# Altium PCB Grabber_DIOT.PCBDOC (part 5 of 7)
Units mm, origin at the board's own origin, x right, y up, seen from the top; angles counter-clockwise.
Board outline 222.9 x 100 mm, 4 copper layers (L1, P2, P3, L4), stack 1.6 mm thick; 235 components, 180 nets, 1032 pads, 664 vias.
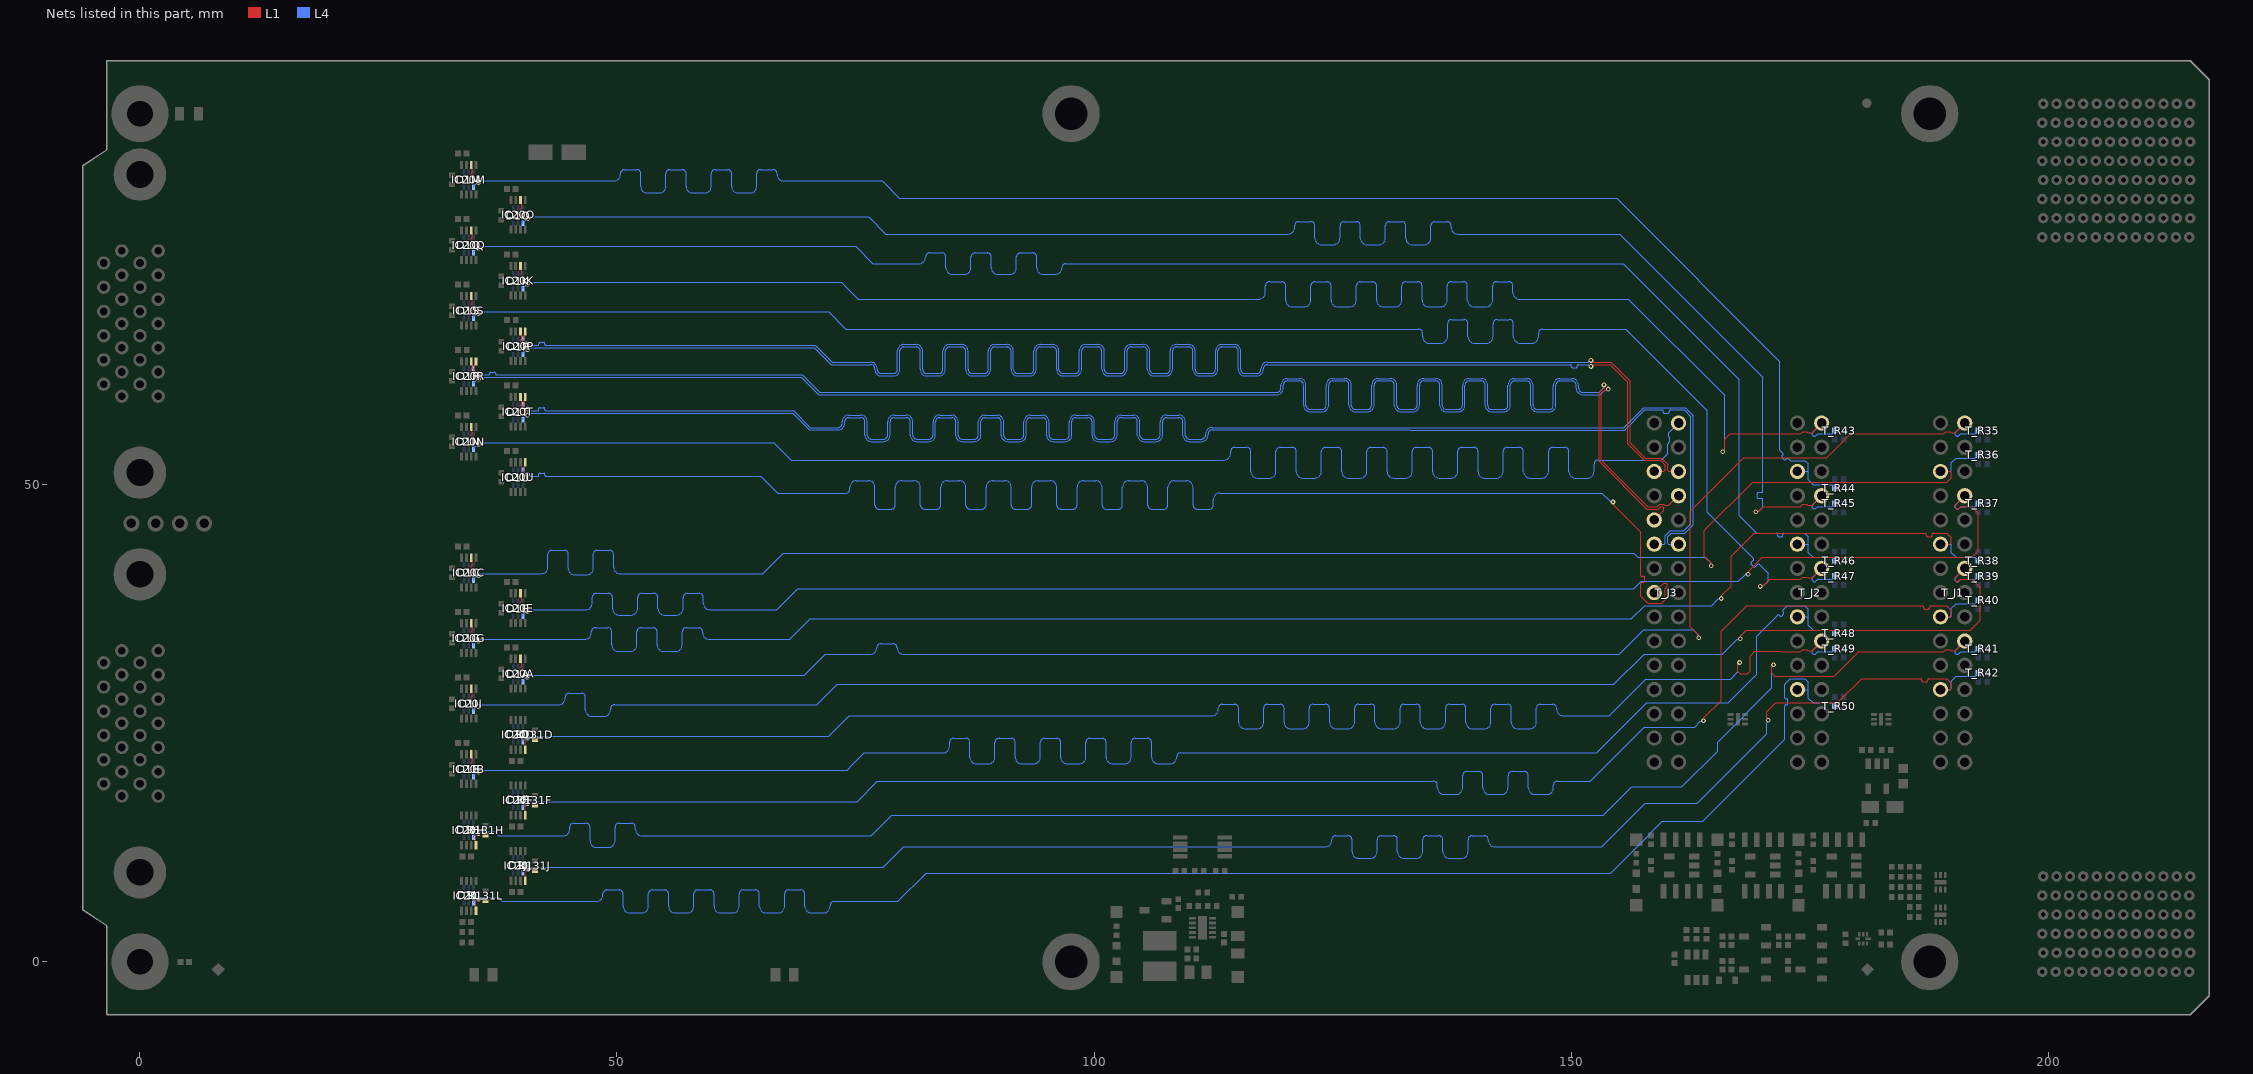
[diagram p6: the nets of this part, all layers, seen from the top]

## Via types
v1: diameter 0.5, hole 0.25, L1 to L4, tented both sides, 661 vias
v2: diameter 0.5, hole 0.25, L1 to L4, 3 vias

## Nets (pads, with @x,y where several pads share a name; then routed paths per layer and width w, separated by ;. In a path a pad name is that pad's centre, name@x,y a point inside that pad or via, vN(x,y) a via of type N, cw(c..) or ccw(c..) an arc to the next point about the centre after c; other vN are vias at no path point) (continued)
EEM_IO.LVDS_N17: D1P.6 IC20P.5 T_J3.6 | length 176.2
  L1 w0.127: IC20P.5@40.378,66.099 40.378,65.824 40.257,65.704 40.257,65.189 40.122,65.054 40.122,64.687 40.197,64.613 40.372,64.613 40.558,64.799 v1(40.633,64.799) ; v1(152.089,63.036) 152.164,63.036 152.349,62.85 154.219,62.85 156.041,61.028 156.19,60.879 156.19,54.399 157.783,52.806 159.485,52.806 160.127,52.164 160.127,51.535 160.262,51.4 T_J3.6@161.27,51.4
  L4 w0.127: D1P.6@40.13,65.276 40.13,65.141 40.217,65.055 40.276,65.055 40.532,64.799 v1(40.633,64.799) 40.708,64.799 40.894,64.613 41.625,64.613 41.688,64.613 ccw(c41.688,64.74) 41.815,64.74 41.815,64.807 cw(c41.941,64.807) 41.941,64.932 42.317,64.932 cw(c42.317,64.807) 42.442,64.807 42.442,64.74 ccw(c42.569,64.74) 42.569,64.613 42.939,64.613 70.786,64.613 72.549,62.85 75.386,62.85 76.596,62.85 cw(c76.596,62.171) 77.275,62.171 77.275,62.098 ccw(c77.701,62.098) 77.701,61.673 78.977,61.673 ccw(c78.977,62.098) 79.402,62.098 79.402,64.029 cw(c80.082,64.029) 80.082,64.709 81.358,64.709 cw(c81.358,64.029) 82.037,64.029 82.037,62.098 ccw(c82.463,62.098) 82.463,61.673 83.739,61.673 ccw(c83.739,62.098) 84.164,62.098 84.164,64.029 cw(c84.844,64.029) 84.844,64.709 86.12,64.709 cw(c86.12,64.029) 86.799,64.029 86.799,62.098 ccw(c87.225,62.098) 87.225,61.673 88.501,61.673 ccw(c88.501,62.098) 88.926,62.098 88.926,64.029 cw(c89.606,64.029) 89.606,64.709 90.882,64.709 cw(c90.882,64.029) 91.561,64.029 91.561,62.098 ccw(c91.987,62.098) 91.987,61.673 93.263,61.673 ccw(c93.263,62.098) 93.688,62.098 93.688,64.029 cw(c94.368,64.029) 94.368,64.709 95.644,64.709 cw(c95.644,64.029) 96.323,64.029 96.323,62.098 ccw(c96.749,62.098) 96.749,61.673 98.025,61.673 ccw(c98.025,62.098) 98.45,62.098 98.45,64.029 cw(c99.13,64.029) 99.13,64.709 100.406,64.709 cw(c100.406,64.029) 101.085,64.029 101.085,62.098 ccw(c101.511,62.098) 101.511,61.673 102.787,61.673 ccw(c102.787,62.098) 103.212,62.098 103.212,64.029 cw(c103.892,64.029) 103.892,64.709 105.168,64.709 cw(c105.168,64.029) 105.847,64.029 105.847,62.098 ccw(c106.273,62.098) 106.273,61.673 107.549,61.673 ccw(c107.549,62.098) 107.974,62.098 107.974,64.029 cw(c108.654,64.029) 108.654,64.709 109.93,64.709 cw(c109.93,64.029) 110.609,64.029 110.609,62.098 ccw(c111.035,62.098) 111.035,61.673 112.311,61.673 ccw(c112.311,62.098) 112.736,62.098 112.736,64.029 cw(c113.416,64.029) 113.416,64.709 114.692,64.709 cw(c114.692,64.029) 115.371,64.029 115.371,62.098 ccw(c115.797,62.098) 115.797,61.673 117.073,61.673 ccw(c117.073,62.098) 117.498,62.098 117.498,62.171 cw(c118.178,62.171) 118.178,62.85 118.368,62.85 151.828,62.85 152.013,63.036 v1(152.089,63.036)
EEM_IO.LVDS_N18: D1R.6 IC20R.5 T_J3.9 | length 176.3
  L1 w0.127: IC20R.5@35.215,63.006 35.215,62.731 35.095,62.61 35.095,62.095 34.96,61.96 34.96,61.593 35.034,61.519 35.209,61.519 35.395,61.705 v1(35.47,61.705) ; v1(153.463,60.474) 153.41,60.42 153.41,60.158 152.94,59.688 152.94,52.469 153.014,52.395 157.946,47.463 159.154,47.463 159.391,47.7 159.61,47.7 159.63,47.68 159.731,47.579 159.731,47.321 T_J3.9@158.73,46.32
  L4 w0.127: D1R.6@34.968,62.183 34.968,62.048 35.054,61.961 35.113,61.961 35.369,61.705 v1(35.47,61.705) 35.545,61.705 35.731,61.519 36.462,61.519 36.526,61.519 ccw(c36.526,61.646) 36.653,61.646 36.653,61.654 cw(c36.778,61.654) 36.778,61.779 37.154,61.779 cw(c37.154,61.654) 37.28,61.654 37.28,61.646 ccw(c37.407,61.646) 37.407,61.519 37.777,61.519 69.434,61.519 71.247,59.706 118.967,59.706 119.157,59.706 ccw(c119.157,60.132) 119.582,60.132 119.582,60.458 cw(c120.262,60.458) 120.262,61.137 121.538,61.137 cw(c121.538,60.458) 122.217,60.458 122.217,58.34 ccw(c122.643,58.34) 122.643,57.914 123.919,57.914 ccw(c123.919,58.34) 124.344,58.34 124.344,60.458 cw(c125.024,60.458) 125.024,61.137 126.3,61.137 cw(c126.3,60.458) 126.979,60.458 126.979,58.34 ccw(c127.405,58.34) 127.405,57.914 128.681,57.914 ccw(c128.681,58.34) 129.106,58.34 129.106,60.458 cw(c129.786,60.458) 129.786,61.137 131.062,61.137 cw(c131.062,60.458) 131.741,60.458 131.741,58.34 ccw(c132.167,58.34) 132.167,57.914 133.443,57.914 ccw(c133.443,58.34) 133.868,58.34 133.868,60.458 cw(c134.548,60.458) 134.548,61.137 135.824,61.137 cw(c135.824,60.458) 136.503,60.458 136.503,58.34 ccw(c136.929,58.34) 136.929,57.914 138.205,57.914 ccw(c138.205,58.34) 138.63,58.34 138.63,60.458 cw(c139.31,60.458) 139.31,61.137 140.586,61.137 cw(c140.586,60.458) 141.265,60.458 141.265,58.34 ccw(c141.691,58.34) 141.691,57.914 142.967,57.914 ccw(c142.967,58.34) 143.392,58.34 143.392,60.458 cw(c144.072,60.458) 144.072,61.137 145.348,61.137 cw(c145.348,60.458) 146.027,60.458 146.027,58.34 ccw(c146.453,58.34) 146.453,57.914 147.729,57.914 ccw(c147.729,58.34) 148.154,58.34 148.154,60.458 cw(c148.834,60.458) 148.834,61.137 150.11,61.137 cw(c150.11,60.458) 150.789,60.458 150.789,60.132 ccw(c151.215,60.132) 151.215,59.706 152.019,59.706 152.958,59.706 153.41,60.158 153.41,60.42 v1(153.463,60.474)
EEM_IO.LVDS_N19: D1T.6 IC20T.5 T_J3.12 | length 176.3
  L1 w0.127: IC20T.5@40.378,59.236 40.378,58.961 40.257,58.84 40.257,58.325 40.122,58.19 40.122,57.823 40.197,57.749 40.372,57.749 40.558,57.935 v1(40.633,57.935)
  L4 w0.127: D1T.6@40.13,58.412 40.13,58.277 40.217,58.191 40.276,58.191 40.532,57.935 v1(40.633,57.935) 40.708,57.935 40.894,57.749 41.625,57.749 41.688,57.749 ccw(c41.688,57.876) 41.815,57.876 41.815,57.971 cw(c41.941,57.971) 41.941,58.096 42.317,58.096 cw(c42.317,57.971) 42.442,57.971 42.442,57.876 ccw(c42.569,57.876) 42.569,57.749 42.939,57.749 68.527,57.749 70.277,55.999 72.987,55.999 73.177,55.999 ccw(c73.177,56.424) 73.603,56.424 73.603,56.619 cw(c74.282,56.619) 74.282,57.298 75.558,57.298 cw(c75.558,56.619) 76.238,56.619 76.238,55.212 ccw(c76.663,55.212) 76.663,54.787 77.939,54.787 ccw(c77.939,55.212) 78.365,55.212 78.365,56.619 cw(c79.044,56.619) 79.044,57.298 80.32,57.298 cw(c80.32,56.619) 81,56.619 81,55.212 ccw(c81.425,55.212) 81.425,54.787 82.701,54.787 ccw(c82.701,55.212) 83.127,55.212 83.127,56.619 cw(c83.806,56.619) 83.806,57.298 85.082,57.298 cw(c85.082,56.619) 85.762,56.619 85.762,55.212 ccw(c86.187,55.212) 86.187,54.787 87.463,54.787 ccw(c87.463,55.212) 87.889,55.212 87.889,56.619 cw(c88.568,56.619) 88.568,57.298 89.844,57.298 cw(c89.844,56.619) 90.524,56.619 90.524,55.212 ccw(c90.949,55.212) 90.949,54.787 92.225,54.787 ccw(c92.225,55.212) 92.651,55.212 92.651,56.619 cw(c93.33,56.619) 93.33,57.298 94.606,57.298 cw(c94.606,56.619) 95.286,56.619 95.286,55.212 ccw(c95.711,55.212) 95.711,54.787 96.987,54.787 ccw(c96.987,55.212) 97.413,55.212 97.413,56.619 cw(c98.092,56.619) 98.092,57.298 99.368,57.298 cw(c99.368,56.619) 100.048,56.619 100.048,55.212 ccw(c100.473,55.212) 100.473,54.787 101.749,54.787 ccw(c101.749,55.212) 102.175,55.212 102.175,56.619 cw(c102.854,56.619) 102.854,57.298 104.13,57.298 cw(c104.13,56.619) 104.81,56.619 104.81,55.212 ccw(c105.235,55.212) 105.235,54.787 106.511,54.787 ccw(c106.511,55.212) 106.937,55.212 106.937,56.619 cw(c107.616,56.619) 107.616,57.298 108.892,57.298 cw(c108.892,56.619) 109.572,56.619 109.572,55.212 ccw(c109.997,55.212) 109.997,54.787 111.273,54.787 ccw(c111.273,55.212) 111.699,55.212 111.699,55.32 cw(c112.378,55.32) 112.378,55.999 114.278,55.999 133.217,55.999 133.23,55.986 155.505,55.986 157.617,58.099 161.984,58.099 162.819,57.264 162.819,45.83 161.912,44.923 160.481,44.923 160.127,44.569 160.127,43.854 160.201,43.78 T_J3.12@161.27,43.78
EEM_IO.LVDS_N20: D1U.6 IC20U.5 T_J3.15 | length 176.2
  L1 w0.127: IC20U.5@40.378,52.372 40.378,52.097 40.257,51.976 40.257,51.461 40.122,51.327 40.122,50.96 40.197,50.885 40.372,50.885 40.558,51.071 v1(40.633,51.071) ; v1(154.404,48.199) 154.458,48.146 154.458,47.884 154.583,47.759 157.313,45.028 157.313,40.59 157.313,40.526 ccw(c157.44,40.526) 157.44,40.399 157.612,40.399 cw(c157.612,40.274) 157.737,40.274 157.737,39.898 cw(c157.612,39.898) 157.612,39.772 157.44,39.772 ccw(c157.44,39.645) 157.313,39.645 157.313,39.119 157.313,38.334 158.058,37.59 159.506,37.59 159.873,37.957 159.873,39.124 160.11,39.361 160.11,39.58 160.09,39.6 159.989,39.701 159.731,39.701 T_J3.15@158.73,38.7
  L4 w0.127: D1U.6@40.13,51.549 40.13,51.414 40.217,51.327 40.276,51.327 40.532,51.071 v1(40.633,51.071) 40.708,51.071 40.894,50.885 41.625,50.885 41.688,50.885 ccw(c41.688,51.012) 41.815,51.012 41.815,51.107 cw(c41.941,51.107) 41.941,51.232 42.317,51.232 cw(c42.317,51.107) 42.442,51.107 42.442,51.012 ccw(c42.569,51.012) 42.569,50.885 42.939,50.885 65.064,50.885 66.827,49.122 73.793,49.122 73.983,49.122 ccw(c73.983,49.548) 74.409,49.548 74.409,49.746 cw(c75.088,49.746) 75.088,50.426 76.364,50.426 cw(c76.364,49.746) 77.044,49.746 77.044,47.873 ccw(c77.469,47.873) 77.469,47.448 78.745,47.448 ccw(c78.745,47.873) 79.171,47.873 79.171,49.746 cw(c79.85,49.746) 79.85,50.426 81.126,50.426 cw(c81.126,49.746) 81.806,49.746 81.806,47.873 ccw(c82.231,47.873) 82.231,47.448 83.507,47.448 ccw(c83.507,47.873) 83.933,47.873 83.933,49.746 cw(c84.612,49.746) 84.612,50.426 85.888,50.426 cw(c85.888,49.746) 86.568,49.746 86.568,47.873 ccw(c86.993,47.873) 86.993,47.448 88.269,47.448 ccw(c88.269,47.873) 88.695,47.873 88.695,49.746 cw(c89.374,49.746) 89.374,50.426 90.65,50.426 cw(c90.65,49.746) 91.33,49.746 91.33,47.873 ccw(c91.755,47.873) 91.755,47.448 93.031,47.448 ccw(c93.031,47.873) 93.457,47.873 93.457,49.746 cw(c94.136,49.746) 94.136,50.426 95.412,50.426 cw(c95.412,49.746) 96.092,49.746 96.092,47.873 ccw(c96.517,47.873) 96.517,47.448 97.793,47.448 ccw(c97.793,47.873) 98.219,47.873 98.219,49.746 cw(c98.898,49.746) 98.898,50.426 100.174,50.426 cw(c100.174,49.746) 100.854,49.746 100.854,47.873 ccw(c101.279,47.873) 101.279,47.448 102.555,47.448 ccw(c102.555,47.873) 102.981,47.873 102.981,49.746 cw(c103.66,49.746) 103.66,50.426 104.936,50.426 cw(c104.936,49.746) 105.616,49.746 105.616,47.873 ccw(c106.041,47.873) 106.041,47.448 107.317,47.448 ccw(c107.317,47.873) 107.743,47.873 107.743,49.746 cw(c108.422,49.746) 108.422,50.426 109.698,50.426 cw(c109.698,49.746) 110.378,49.746 110.378,47.873 ccw(c110.803,47.873) 110.803,47.448 112.079,47.448 ccw(c112.079,47.873) 112.505,47.873 112.505,48.443 cw(c113.184,48.443) 113.184,49.122 115.338,49.122 153.219,49.122 154.089,48.253 154.351,48.253 v1(154.404,48.199)
EEM_IO.LVDS_P0: D1A.1 IC20A.6 T_J1.2 T_R35.2 | length 180.6
  L1 w0.127: IC20A.6@39.878,31.78 39.878,31.505 40.003,31.38 40.003,30.975 39.868,30.84 39.868,30.263 40.092,30.04 40.372,30.04 40.558,29.854 v1(40.633,29.854) ; v1(163.389,33.958) 163.335,34.011 163.335,34.274 162.5,35.11 162.5,47.212 168.108,52.821 176.792,52.821 179.309,55.337 186.027,55.337 189.049,55.337 189.286,55.574 189.715,55.574 189.736,55.554 189.81,55.479 190.269,55.479 T_J1.2@191.27,56.48
  L4 w0.127: D1A.1@40.13,29.377 40.13,29.512 40.217,29.599 40.277,29.599 40.532,29.854 v1(40.633,29.854) 40.708,29.854 40.894,30.04 69.638,30.04 71.834,32.236 76.358,32.236 76.549,32.236 ccw(c76.549,32.916) 77.228,32.916 cw(c77.653,32.916) 77.653,33.342 78.93,33.342 cw(c78.93,32.916) 79.355,32.916 ccw(c80.034,32.916) 80.034,32.236 81.012,32.236 155.045,32.236 157.609,34.8 162.809,34.8 163.335,34.274 163.335,34.011 v1(163.389,33.958) ; T_J1.2@191.27,56.48 190.269,55.479 190.269,55.221 190.37,55.12 190.39,55.1 190.609,55.1 190.846,55.337 192.367,55.337 192.442,55.411 192.442,55.453 T_R35.2@192.668,55.68
EEM_IO.LVDS_P1: D1C.1 IC20C.6 T_J1.5 T_R36.2 | length 181.5
  L1 w0.127: IC20C.6@34.715,42.414 34.715,42.139 34.841,42.014 34.841,41.609 34.706,41.474 34.706,40.897 34.929,40.674 35.209,40.674 35.395,40.488 v1(35.47,40.488) ; v1(164.693,41.523) 164.628,41.588 164.628,41.826 163.991,42.464 163.991,45.213 169.025,50.248 189.38,50.248 189.873,50.742 189.873,51.265 189.738,51.4 T_J1.5@188.73,51.4
  L4 w0.127: D1C.1@34.968,40.011 34.968,40.146 35.054,40.233 35.114,40.233 35.369,40.488 v1(35.47,40.488) 35.545,40.488 35.731,40.674 41.889,40.674 42.079,40.674 ccw(c42.079,41.353) 42.758,41.353 42.758,42.725 cw(c43.184,42.725) 43.184,43.151 44.46,43.151 cw(c44.46,42.725) 44.885,42.725 44.885,41.251 ccw(c45.565,41.251) 45.565,40.571 46.841,40.571 ccw(c46.841,41.251) 47.52,41.251 47.52,42.725 cw(c47.946,42.725) 47.946,43.151 49.222,43.151 cw(c49.222,42.725) 49.647,42.725 49.647,41.353 ccw(c50.327,41.353) 50.327,40.674 51.463,40.674 65.268,40.674 67.403,42.808 156.582,42.808 157,42.39 164.088,42.39 164.64,41.839 164.64,41.576 v1(164.693,41.523) ; T_J1.5@188.73,51.4 189.799,51.4 189.873,51.474 189.873,52.294 190.376,52.797 192.367,52.797 192.442,52.871 192.442,52.913 T_R36.2@192.668,53.14
EEM_IO.LVDS_P2: D1E.1 IC20E.6 T_J1.8 T_R37.2 | length 180.7
  L1 w0.127: IC20E.6@39.878,38.644 39.878,38.369 40.003,38.244 40.003,37.839 39.868,37.704 39.868,37.127 40.092,36.904 40.372,36.904 40.558,36.718 v1(40.633,36.718) ; v1(168.561,40.627) 168.614,40.68 168.614,40.942 170.067,42.395 191.981,42.395 192.667,43.082 192.667,47.028 192.408,47.288 191.978,47.717 190.846,47.717 190.609,47.48 190.39,47.48 190.37,47.5 190.269,47.601 190.269,47.859 T_J1.8@191.27,48.86
  L4 w0.127: D1E.1@40.13,36.241 40.13,36.376 40.138,36.384 40.217,36.463 40.277,36.463 40.532,36.718 v1(40.633,36.718) 40.708,36.718 40.894,36.904 46.534,36.904 46.724,36.904 ccw(c46.724,37.583) 47.404,37.583 47.404,38.191 cw(c47.829,38.191) 47.829,38.617 49.105,38.617 cw(c49.105,38.191) 49.531,38.191 49.531,37.027 ccw(c50.21,37.027) 50.21,36.348 51.486,36.348 ccw(c51.486,37.027) 52.166,37.027 52.166,38.191 cw(c52.591,38.191) 52.591,38.617 53.867,38.617 cw(c53.867,38.191) 54.293,38.191 54.293,37.027 ccw(c54.972,37.027) 54.972,36.348 56.248,36.348 ccw(c56.248,37.027) 56.928,37.027 56.928,38.191 cw(c57.353,38.191) 57.353,38.617 58.629,38.617 cw(c58.629,38.191) 59.055,38.191 59.055,37.583 ccw(c59.734,37.583) 59.734,36.904 60.974,36.904 66.759,36.904 68.944,39.088 156.563,39.088 157.348,39.873 167.545,39.873 168.245,40.573 168.508,40.573 v1(168.561,40.627) ; T_J1.8@191.27,48.86 190.269,47.859 190.269,47.601 190.37,47.5 190.39,47.48 190.609,47.48 190.846,47.717 192.367,47.717 192.442,47.791 192.442,47.833 T_R37.2@192.668,48.06
EEM_IO.LVDS_P3: D1G.1 IC20G.6 T_J1.11 T_R38.2 | length 181.5
  L1 w0.127: IC20G.6@34.715,35.55 34.715,35.275 34.841,35.15 34.841,34.745 34.706,34.61 34.706,34.033 34.929,33.81 35.209,33.81 35.395,33.624 v1(35.47,33.624) ; v1(165.746,38.084) 165.799,38.138 165.799,38.4 166.778,39.379 166.778,42.505 169.205,44.932 186.428,44.932 187.118,44.932 cw(c187.118,44.805) 187.245,44.805 187.245,44.703 ccw(c187.371,44.703) 187.371,44.578 187.747,44.578 ccw(c187.747,44.703) 187.872,44.703 187.872,44.805 cw(c187.999,44.805) 187.999,44.932 188.731,44.932 189.38,44.932 189.873,44.439 189.873,43.915 189.738,43.78 T_J1.11@188.73,43.78
  L4 w0.127: D1G.1@34.968,33.147 34.968,33.282 35.054,33.369 35.114,33.369 35.369,33.624 v1(35.47,33.624) 35.545,33.624 35.731,33.81 46.452,33.81 46.643,33.81 ccw(c46.643,34.489) 47.322,34.489 47.322,34.596 cw(c47.748,34.596) 47.748,35.022 49.024,35.022 cw(c49.024,34.596) 49.449,34.596 49.449,33.222 ccw(c50.129,33.222) 50.129,32.542 51.405,32.542 ccw(c51.405,33.222) 52.084,33.222 52.084,34.596 cw(c52.51,34.596) 52.51,35.022 53.786,35.022 cw(c53.786,34.596) 54.211,34.596 54.211,33.222 ccw(c54.891,33.222) 54.891,32.542 56.167,32.542 ccw(c56.167,33.222) 56.846,33.222 56.846,34.596 cw(c57.272,34.596) 57.272,35.022 58.548,35.022 cw(c58.548,34.596) 58.973,34.596 58.973,34.489 ccw(c59.653,34.489) 59.653,33.81 61.565,33.81 68.111,33.81 70.246,35.945 156.329,35.945 157.711,37.327 164.726,37.327 165.431,38.031 165.693,38.031 v1(165.746,38.084) ; T_J1.11@188.73,43.78 189.799,43.78 189.873,43.706 189.873,42.886 190.376,42.383 192.367,42.383 192.442,42.309 192.442,42.267 T_R38.2@192.668,42.041
EEM_IO.LVDS_P4: D1I.1 IC20I.6 T_J1.14 T_R39.2 | length 180.7
  L1 w0.127: IC20I.6@34.715,28.687 34.715,28.412 34.841,28.286 34.841,27.881 34.706,27.747 34.706,27.169 34.929,26.946 35.209,26.946 35.395,26.76 v1(35.47,26.76) ; v1(167.744,33.864) 167.797,33.917 167.797,34.18 168.376,34.758 191.842,34.758 192.892,35.808 192.892,39.249 192.044,40.097 190.846,40.097 190.609,39.86 190.39,39.86 190.37,39.88 190.269,39.981 190.269,40.239 T_J1.14@191.27,41.24
  L4 w0.127: D1I.1@34.968,26.284 34.968,26.419 35.054,26.505 35.114,26.505 35.369,26.76 v1(35.47,26.76) 35.545,26.76 35.731,26.946 43.69,26.946 43.88,26.946 ccw(c43.88,27.625) 44.56,27.625 44.56,27.733 cw(c44.985,27.733) 44.985,28.158 46.261,28.158 cw(c46.261,27.733) 46.687,27.733 46.687,26.413 ccw(c47.366,26.413) 47.366,25.734 48.642,25.734 ccw(c48.642,26.413) 49.322,26.413 49.322,26.521 cw(c49.747,26.521) 49.747,26.946 51.091,26.946 70.954,26.946 73.089,29.081 154.494,29.081 157.667,32.254 165.872,32.254 167.428,33.811 167.691,33.811 v1(167.744,33.864) ; T_J1.14@191.27,41.24 190.269,40.239 190.269,39.981 190.37,39.88 190.39,39.86 190.609,39.86 190.846,40.097 192.367,40.097 192.442,40.171 192.442,40.213 T_R39.2@192.668,40.44
EEM_IO.LVDS_P5: D1F.4 IC20F.8 R131F.2 T_J1.17 T_R40.2 | length 182.2
  L1 w0.127: IC20F.8@40.38,15.364 40.38,16.361 v1@40.63,16.611 ; v1@40.633,16.611 41.226,16.611 R131F.2@41.389,16.448 ; v1(163.883,25.266) 163.936,25.319 163.936,25.581 165.733,27.379 165.733,34.639 168.406,37.312 186.144,37.312 186.834,37.312 cw(c186.834,37.185) 186.961,37.185 186.961,37.099 ccw(c187.087,37.099) 187.087,36.973 187.463,36.973 ccw(c187.463,37.099) 187.588,37.099 187.588,37.185 cw(c187.715,37.185) 187.715,37.312 188.169,37.312 189.38,37.312 189.873,36.819 189.873,36.295 189.738,36.16 T_J1.17@188.73,36.16
  L4 w0.127: D1F.4@40.128,16.187 40.128,16.322 40.214,16.409 40.273,16.409 40.529,16.665 40.761,16.665 40.894,16.798 75.168,16.798 77.295,18.926 130.12,18.926 135.578,18.926 cw(c135.578,18.5) 136.004,18.5 136.004,18.235 ccw(c136.683,18.235) 136.683,17.555 137.959,17.555 ccw(c137.959,18.235) 138.639,18.235 138.639,19.526 cw(c139.064,19.526) 139.064,19.951 140.34,19.951 cw(c140.34,19.526) 140.766,19.526 140.766,18.235 ccw(c141.445,18.235) 141.445,17.555 142.721,17.555 ccw(c142.721,18.235) 143.401,18.235 143.401,19.526 cw(c143.826,19.526) 143.826,19.951 145.102,19.951 cw(c145.102,19.526) 145.528,19.526 145.528,18.235 ccw(c146.207,18.235) 146.207,17.555 147.483,17.555 ccw(c147.483,18.235) 148.163,18.235 148.163,18.5 cw(c148.588,18.5) 148.588,18.926 148.779,18.926 152.003,18.926 157.676,24.598 162.952,24.598 163.567,25.213 163.829,25.213 v1(163.883,25.266) ; T_J1.17@188.73,36.16 189.799,36.16 189.873,36.234 189.873,37.054 190.376,37.557 192.367,37.557 192.442,37.631 192.442,37.673 T_R40.2@192.668,37.9
  other v1: 40.633,16.601
EEM_IO.LVDS_P6: D1H.4 IC20H.8 R131H.2 T_J1.20 T_R41.2 | length 181.4
  L1 w0.127: IC20H.8@35.218,12.221 35.218,13.217 v1@35.468,13.467 ; v1@35.47,13.467 36.063,13.467 R131H.2@36.226,13.305 ; v1(171.218,31.13) 171.218,31.054 171.033,30.869 171.033,30.224 171.331,29.926 177.613,29.926 180.163,32.477 189.049,32.477 189.286,32.714 189.715,32.714 189.736,32.694 189.81,32.619 190.269,32.619 T_J1.20@191.27,33.62
  L4 w0.127: D1H.4@34.965,13.044 34.965,13.179 35.052,13.265 35.111,13.265 35.367,13.521 35.598,13.521 35.731,13.655 37.189,13.655 37.63,13.214 44.174,13.214 44.365,13.214 ccw(c44.365,13.893) 45.044,13.893 45.044,14.114 cw(c45.469,14.114) 45.469,14.539 46.746,14.539 cw(c46.746,14.114) 47.171,14.114 47.171,12.681 ccw(c47.85,12.681) 47.85,12.002 49.127,12.002 ccw(c49.127,12.681) 49.806,12.681 49.806,14.114 cw(c50.231,14.114) 50.231,14.539 51.508,14.539 cw(c51.508,14.114) 51.933,14.114 51.933,13.893 ccw(c52.612,13.893) 52.612,13.214 55.53,13.214 76.635,13.214 78.775,15.353 153.382,15.353 156.384,18.355 161.632,18.355 165.36,22.084 165.36,23.04 171.033,28.712 171.033,30.869 171.218,31.054 v1(171.218,31.13) ; T_J1.20@191.27,33.62 190.269,32.619 190.269,32.361 190.37,32.26 190.39,32.24 190.609,32.24 190.846,32.477 192.367,32.477 192.442,32.551 192.442,32.593 T_R41.2@192.668,32.82
  other v1: 35.47,13.457
EEM_IO.LVDS_P7: D1J.4 IC20J.8 R131J.2 T_J1.23 T_R42.2 | length 182.2
  L1 w0.127: IC20J.8@40.38,8.501 40.38,9.497 v1@40.63,9.747 ; v1@40.633,9.747 41.226,9.747 R131J.2@41.389,9.584 ; v1(170.681,25.314) 170.681,25.389 170.495,25.575 170.495,26.193 171.438,27.136 177.903,27.136 180.459,29.692 185.948,29.692 186.638,29.692 cw(c186.638,29.565) 186.765,29.565 186.765,29.489 ccw(c186.89,29.489) 186.89,29.364 187.267,29.364 ccw(c187.267,29.489) 187.392,29.489 187.392,29.565 cw(c187.519,29.565) 187.519,29.692 188.024,29.692 189.38,29.692 189.873,29.199 189.873,28.675 189.738,28.54 T_J1.23@188.73,28.54
  L4 w0.127: D1J.4@40.128,9.324 40.128,9.459 40.214,9.545 40.273,9.545 40.529,9.801 40.761,9.801 40.894,9.934 77.906,9.934 80.033,12.062 124.049,12.062 124.24,12.062 ccw(c124.24,12.741) 124.919,12.741 124.919,12.791 cw(c125.345,12.791) 125.345,13.216 126.621,13.216 cw(c126.621,12.791) 127.046,12.791 127.046,11.529 ccw(c127.726,11.529) 127.726,10.85 129.002,10.85 ccw(c129.002,11.529) 129.681,11.529 129.681,12.791 cw(c130.107,12.791) 130.107,13.216 131.383,13.216 cw(c131.383,12.791) 131.808,12.791 131.808,11.529 ccw(c132.488,11.529) 132.488,10.85 133.764,10.85 ccw(c133.764,11.529) 134.443,11.529 134.443,12.791 cw(c134.869,12.791) 134.869,13.216 136.145,13.216 cw(c136.145,12.791) 136.57,12.791 136.57,11.529 ccw(c137.25,11.529) 137.25,10.85 138.526,10.85 ccw(c138.526,11.529) 139.205,11.529 139.205,12.791 cw(c139.631,12.791) 139.631,13.216 140.907,13.216 cw(c140.907,12.791) 141.332,12.791 141.332,12.741 ccw(c142.012,12.741) 142.012,12.062 144.284,12.062 153.213,12.062 157.763,16.612 163.223,16.612 170.495,23.884 170.495,25.053 170.681,25.239 v1(170.681,25.314) ; T_J1.23@188.73,28.54 189.799,28.54 189.873,28.614 189.873,29.434 190.376,29.937 192.367,29.937 192.442,30.011 192.442,30.053 T_R42.2@192.668,30.28
  other v1: 40.633,9.737
EEM_IO.LVDS_P8: D1K.1 IC20K.6 T_J2.2 T_R43.2 | length 180.6
  L1 w0.127: IC20K.6@39.878,72.963 39.878,72.688 40.003,72.563 40.003,72.158 39.868,72.023 39.868,71.446 40.092,71.223 40.372,71.223 40.558,71.037 v1(40.633,71.037) ; v1(165.912,53.476) 165.912,53.559 166.091,53.737 166.091,54.753 166.675,55.337 174.049,55.337 174.286,55.574 174.715,55.574 174.736,55.554 174.81,55.479 175.269,55.479 T_J2.2@176.27,56.48
  L4 w0.127: D1K.1@40.13,70.56 40.13,70.695 40.217,70.782 40.277,70.782 40.532,71.037 v1(40.633,71.037) 40.708,71.037 40.894,71.223 73.524,71.223 75.287,69.46 117.101,69.46 117.292,69.46 ccw(c117.292,70.139) 117.971,70.139 117.971,70.857 cw(c118.396,70.857) 118.396,71.282 119.673,71.282 cw(c119.673,70.857) 120.098,70.857 120.098,69.343 ccw(c120.777,69.343) 120.777,68.663 122.054,68.663 ccw(c122.054,69.343) 122.733,69.343 122.733,70.857 cw(c123.158,70.857) 123.158,71.282 124.435,71.282 cw(c124.435,70.857) 124.86,70.857 124.86,69.343 ccw(c125.539,69.343) 125.539,68.663 126.816,68.663 ccw(c126.816,69.343) 127.495,69.343 127.495,70.857 cw(c127.92,70.857) 127.92,71.282 129.197,71.282 cw(c129.197,70.857) 129.622,70.857 129.622,69.343 ccw(c130.301,69.343) 130.301,68.663 131.578,68.663 ccw(c131.578,69.343) 132.257,69.343 132.257,70.857 cw(c132.682,70.857) 132.682,71.282 133.959,71.282 cw(c133.959,70.857) 134.384,70.857 134.384,69.343 ccw(c135.063,69.343) 135.063,68.663 136.34,68.663 ccw(c136.34,69.343) 137.019,69.343 137.019,70.857 cw(c137.444,70.857) 137.444,71.282 138.721,71.282 cw(c138.721,70.857) 139.146,70.857 139.146,69.343 ccw(c139.825,69.343) 139.825,68.663 141.102,68.663 ccw(c141.102,69.343) 141.781,69.343 141.781,70.857 cw(c142.206,70.857) 142.206,71.282 143.483,71.282 cw(c143.483,70.857) 143.908,70.857 143.908,70.139 ccw(c144.587,70.139) 144.587,69.46 148.907,69.46 156.008,69.46 166.098,59.37 166.098,53.737 165.912,53.552 v1(165.912,53.476) ; T_J2.2@176.27,56.48 175.269,55.479 175.269,55.221 175.37,55.12 175.39,55.1 175.609,55.1 175.846,55.337 177.367,55.337 177.442,55.411 177.442,55.453 T_R43.2@177.668,55.68
EEM_IO.LVDS_P9: D1M.1 IC20M.6 T_J2.5 T_R44.2 | length 180.4
  L1 w0.127: IC20M.6@34.715,83.597 34.715,83.322 34.841,83.197 34.841,82.792 34.706,82.657 34.706,82.08 34.929,81.856 35.209,81.856 35.395,81.671 v1(35.47,81.671)
  L4 w0.127: D1M.1@34.968,81.194 34.968,81.329 35.054,81.415 35.114,81.415 35.369,81.671 v1(35.47,81.671) 35.545,81.671 35.731,81.856 49.49,81.856 49.681,81.856 ccw(c49.681,82.536) 50.36,82.536 50.36,82.623 cw(c50.786,82.623) 50.786,83.049 52.062,83.049 cw(c52.062,82.623) 52.487,82.623 52.487,81.272 ccw(c53.167,81.272) 53.167,80.593 54.443,80.593 ccw(c54.443,81.272) 55.122,81.272 55.122,82.623 cw(c55.548,82.623) 55.548,83.049 56.824,83.049 cw(c56.824,82.623) 57.249,82.623 57.249,81.272 ccw(c57.929,81.272) 57.929,80.593 59.205,80.593 ccw(c59.205,81.272) 59.884,81.272 59.884,82.623 cw(c60.31,82.623) 60.31,83.049 61.586,83.049 cw(c61.586,82.623) 62.011,82.623 62.011,81.272 ccw(c62.691,81.272) 62.691,80.593 63.967,80.593 ccw(c63.967,81.272) 64.646,81.272 64.646,82.623 cw(c65.072,82.623) 65.072,83.049 66.348,83.049 cw(c66.348,82.623) 66.773,82.623 66.773,82.536 ccw(c67.453,82.536) 67.453,81.856 68.647,81.856 77.781,81.856 79.595,80.043 80.138,80.043 80.243,80.043 154.784,80.043 171.903,62.925 171.903,53.605 171.938,53.57 171.983,53.525 172.203,53.305 cw(c172.113,53.215) 172.203,53.125 172.103,53.025 ccw(c172.177,52.95) 172.103,52.876 172.326,52.652 ccw(c172.401,52.727) 172.475,52.652 172.576,52.753 cw(c172.665,52.663) 172.755,52.753 172.8,52.708 172.965,52.543 174.519,52.543 174.873,52.189 174.873,51.474 174.799,51.4 ; T_J2.5@173.73,51.4 174.799,51.4 ; T_R44.2@177.668,49.661 177.442,49.887 177.442,49.929 177.367,50.003 175.376,50.003 174.873,50.506 174.873,51.326 174.799,51.4
EEM_IO.LVDS_P10: D1O.1 IC20O.6 T_J2.8 T_R45.2 | length 180.6
  L1 w0.127: IC20O.6@39.878,79.827 39.878,79.552 40.003,79.426 40.003,79.022 39.868,78.887 39.868,78.31 40.092,78.086 40.372,78.086 40.558,77.901 v1(40.633,77.901) ; v1(169.367,47.183) 169.421,47.236 169.683,47.236 170.164,47.717 174.049,47.717 174.286,47.954 174.715,47.954 174.736,47.934 174.81,47.859 175.269,47.859 T_J2.8@176.27,48.86
  L4 w0.127: D1O.1@40.13,77.424 40.13,77.559 40.217,77.645 40.277,77.645 40.532,77.901 v1(40.633,77.901) 40.708,77.901 40.894,78.086 76.367,78.086 78.172,76.282 118.082,76.282 120.348,76.282 ccw(c120.348,76.961) 121.027,76.961 121.027,77.153 cw(c121.452,77.153) 121.452,77.578 122.729,77.578 cw(c122.729,77.153) 123.154,77.153 123.154,75.856 ccw(c123.833,75.856) 123.833,75.177 125.11,75.177 ccw(c125.11,75.856) 125.789,75.856 125.789,77.153 cw(c126.214,77.153) 126.214,77.578 127.491,77.578 cw(c127.491,77.153) 127.916,77.153 127.916,75.856 ccw(c128.595,75.856) 128.595,75.177 129.872,75.177 ccw(c129.872,75.856) 130.551,75.856 130.551,77.153 cw(c130.976,77.153) 130.976,77.578 132.253,77.578 cw(c132.253,77.153) 132.678,77.153 132.678,75.856 ccw(c133.357,75.856) 133.357,75.177 134.634,75.177 ccw(c134.634,75.856) 135.313,75.856 135.313,77.153 cw(c135.738,77.153) 135.738,77.578 137.015,77.578 cw(c137.015,77.153) 137.44,77.153 137.44,76.961 ccw(c138.119,76.961) 138.119,76.282 140.691,76.282 155.095,76.282 170.111,61.266 170.111,50.549 170.111,50.281 170.111,49.324 cw(c169.984,49.324) 169.984,49.197 169.647,49.197 ccw(c169.647,49.071) 169.522,49.071 169.522,48.695 ccw(c169.647,48.695) 169.647,48.57 169.984,48.57 cw(c169.984,48.443) 170.111,48.443 170.111,48.379 170.111,47.664 169.683,47.236 169.421,47.236 v1(169.367,47.183) ; T_J2.8@176.27,48.86 175.269,47.859 175.269,47.601 175.37,47.5 175.39,47.48 175.609,47.48 175.846,47.717 177.367,47.717 177.442,47.791 177.442,47.833 T_R45.2@177.668,48.06
EEM_IO.LVDS_P11: D1Q.1 IC20Q.6 T_J2.11 T_R46.2 | length 180.4
  L1 w0.127: IC20Q.6@34.715,76.733 34.715,76.458 34.841,76.333 34.841,75.928 34.706,75.793 34.706,75.216 34.929,74.993 35.209,74.993 35.395,74.807 v1(35.47,74.807)
  L4 w0.127: D1Q.1@34.968,74.33 34.968,74.465 35.054,74.552 35.114,74.552 35.369,74.807 v1(35.47,74.807) 35.545,74.807 35.731,74.993 75.015,74.993 76.828,73.18 81.474,73.18 81.665,73.18 ccw(c81.665,73.859) 82.344,73.859 82.344,73.885 cw(c82.769,73.885) 82.769,74.311 84.046,74.311 cw(c84.046,73.885) 84.471,73.885 84.471,72.745 ccw(c85.15,72.745) 85.15,72.066 86.427,72.066 ccw(c86.427,72.745) 87.106,72.745 87.106,73.885 cw(c87.531,73.885) 87.531,74.311 88.808,74.311 cw(c88.808,73.885) 89.233,73.885 89.233,72.745 ccw(c89.912,72.745) 89.912,72.066 91.189,72.066 ccw(c91.189,72.745) 91.868,72.745 91.868,73.885 cw(c92.293,73.885) 92.293,74.311 93.57,74.311 cw(c93.57,73.885) 93.995,73.885 93.995,72.745 ccw(c94.674,72.745) 94.674,72.066 95.951,72.066 ccw(c95.951,72.745) 96.63,72.745 96.63,72.755 cw(c97.055,72.755) 97.055,73.18 99.634,73.18 155.471,73.18 167.621,61.031 167.621,46.767 169.465,44.923 170.936,44.923 171.527,44.923 cw(c171.527,44.796) 171.654,44.796 171.654,44.671 ccw(c171.759,44.671) 171.759,44.565 172.075,44.565 ccw(c172.075,44.671) 172.181,44.671 172.181,44.796 cw(c172.308,44.796) 172.308,44.923 172.925,44.923 174.519,44.923 174.873,44.569 174.873,43.854 174.799,43.78 ; T_J2.11@173.73,43.78 174.799,43.78 ; T_R46.2@177.668,42.041 177.442,42.267 177.442,42.309 177.367,42.383 175.376,42.383 174.873,42.886 174.873,43.706 174.799,43.78
EEM_IO.LVDS_P12: D1S.1 IC20S.6 T_J2.14 T_R47.2 | length 180.7
  L1 w0.127: IC20S.6@34.715,69.869 34.715,69.594 34.841,69.469 34.841,69.064 34.706,68.929 34.706,68.352 34.929,68.129 35.209,68.129 35.395,67.943 v1(35.47,67.943) ; v1(169.838,39.349) 169.894,39.405 170.152,39.405 170.843,40.097 174.049,40.097 174.286,40.334 174.715,40.334 174.736,40.314 174.81,40.239 175.269,40.239 T_J2.14@176.27,41.24
  L4 w0.127: D1S.1@34.968,67.466 34.968,67.601 35.054,67.688 35.114,67.688 35.369,67.943 v1(35.47,67.943) 35.545,67.943 35.731,68.129 72.172,68.129 73.985,66.316 131.437,66.316 134.008,66.316 cw(c134.008,65.891) 134.434,65.891 134.434,65.529 ccw(c135.113,65.529) 135.113,64.85 136.389,64.85 ccw(c136.389,65.529) 137.069,65.529 137.069,66.9 cw(c137.494,66.9) 137.494,67.325 138.77,67.325 cw(c138.77,66.9) 139.196,66.9 139.196,65.529 ccw(c139.875,65.529) 139.875,64.85 141.151,64.85 ccw(c141.151,65.529) 141.831,65.529 141.831,66.9 cw(c142.256,66.9) 142.256,67.325 143.532,67.325 cw(c143.532,66.9) 143.958,66.9 143.958,65.529 ccw(c144.637,65.529) 144.637,64.85 145.913,64.85 ccw(c145.913,65.529) 146.593,65.529 146.593,65.891 cw(c147.018,65.891) 147.018,66.316 148.162,66.316 155.756,66.316 164.29,57.782 164.29,47.107 168.631,42.766 168.676,42.721 169.119,42.278 cw(c169.029,42.188) 169.119,42.098 168.894,41.873 ccw(c168.982,41.784) 168.894,41.696 169.16,41.43 ccw(c169.248,41.518) 169.337,41.43 169.562,41.655 cw(c169.652,41.565) 169.742,41.655 170.353,41.044 170.398,40.999 170.665,40.732 170.665,39.913 170.154,39.403 169.892,39.403 v1(169.838,39.349) ; T_J2.14@176.27,41.24 175.269,40.239 175.269,39.981 175.37,39.88 175.39,39.86 175.609,39.86 175.846,40.097 177.367,40.097 177.442,40.171 177.442,40.213 T_R47.2@177.668,40.44
EEM_IO.LVDS_P13: D1B.1 IC20B.6 T_J2.17 T_R48.2 | length 180.4
  L1 w0.127: IC20B.6@34.715,21.823 34.715,21.548 34.841,21.422 34.841,21.017 34.706,20.883 34.706,20.305 34.929,20.082 35.209,20.082 35.395,19.896 v1(35.47,19.896)
  L4 w0.127: D1B.1@34.968,19.42 34.968,19.555 35.054,19.641 35.114,19.641 35.369,19.896 v1(35.47,19.896) 35.545,19.896 35.731,20.082 74.117,20.082 74.771,20.736 74.774,20.736 75.942,21.904 83.986,21.904 84.091,21.904 84.177,21.904 ccw(c84.177,22.583) 84.856,22.583 84.856,23.008 cw(c85.281,23.008) 85.281,23.433 86.558,23.433 cw(c86.558,23.008) 86.983,23.008 86.983,21.443 ccw(c87.662,21.443) 87.662,20.763 88.939,20.763 ccw(c88.939,21.443) 89.618,21.443 89.618,23.008 cw(c90.043,23.008) 90.043,23.433 91.32,23.433 cw(c91.32,23.008) 91.745,23.008 91.745,21.443 ccw(c92.424,21.443) 92.424,20.763 93.701,20.763 ccw(c93.701,21.443) 94.38,21.443 94.38,23.008 cw(c94.805,23.008) 94.805,23.433 96.082,23.433 cw(c96.082,23.008) 96.507,23.008 96.507,21.443 ccw(c97.186,21.443) 97.186,20.763 98.463,20.763 ccw(c98.463,21.443) 99.142,21.443 99.142,23.008 cw(c99.567,23.008) 99.567,23.433 100.844,23.433 cw(c100.844,23.008) 101.269,23.008 101.269,21.443 ccw(c101.948,21.443) 101.948,20.763 103.225,20.763 ccw(c103.225,21.443) 103.904,21.443 103.904,23.008 cw(c104.329,23.008) 104.329,23.433 105.606,23.433 cw(c105.606,23.008) 106.031,23.008 106.031,21.443 ccw(c106.71,21.443) 106.71,20.763 107.987,20.763 ccw(c107.987,21.443) 108.666,21.443 108.666,21.478 cw(c109.091,21.478) 109.091,21.904 111.429,21.904 111.672,21.904 152.681,21.904 157.934,27.156 166.5,27.156 169.472,30.128 169.472,34.124 171.249,35.902 171.667,36.319 cw(c171.757,36.229) 171.846,36.319 171.918,36.248 ccw(c171.993,36.322) 172.067,36.248 172.291,36.471 ccw(c172.216,36.546) 172.291,36.62 172.219,36.692 cw(c172.309,36.782) 172.219,36.872 172.456,37.108 172.651,37.303 174.519,37.303 174.873,36.949 174.873,36.234 174.799,36.16 ; T_J2.17@173.73,36.16 174.799,36.16 ; T_R48.2@177.668,34.421 177.442,34.647 177.442,34.689 177.367,34.763 175.376,34.763 174.873,35.266 174.873,36.086 174.799,36.16
EEM_IO.LVDS_P14: D1D.4 IC20D.8 R131D.2 T_J2.20 T_R49.2 | length 181.4
  L1 w0.127: IC20D.8@40.38,22.228 40.38,23.225 v1@40.63,23.475 ; v1@40.633,23.475 41.226,23.475 R131D.2@41.389,23.312 ; v1(167.67,31.375) 167.67,31.3 167.484,31.114 167.484,30.43 167.743,30.171 168.491,30.171 168.764,30.444 168.764,32.04 169.275,32.551 171.942,32.551 172.016,32.477 174.049,32.477 174.286,32.714 174.715,32.714 174.736,32.694 174.81,32.619 175.269,32.619 T_J2.20@176.27,33.62
  L4 w0.127: D1D.4@40.128,23.051 40.128,23.186 40.214,23.273 40.273,23.273 40.529,23.529 40.769,23.529 40.894,23.653 72.211,23.653 74.35,25.793 112.165,25.793 112.356,25.793 ccw(c112.356,26.472) 113.035,26.472 113.035,26.58 cw(c113.46,26.58) 113.46,27.005 114.737,27.005 cw(c114.737,26.58) 115.162,26.58 115.162,25.112 ccw(c115.841,25.112) 115.841,24.432 117.118,24.432 ccw(c117.118,25.112) 117.797,25.112 117.797,26.58 cw(c118.222,26.58) 118.222,27.005 119.499,27.005 cw(c119.499,26.58) 119.924,26.58 119.924,25.112 ccw(c120.603,25.112) 120.603,24.432 121.88,24.432 ccw(c121.88,25.112) 122.559,25.112 122.559,26.58 cw(c122.984,26.58) 122.984,27.005 124.261,27.005 cw(c124.261,26.58) 124.686,26.58 124.686,25.112 ccw(c125.365,25.112) 125.365,24.432 126.642,24.432 ccw(c126.642,25.112) 127.321,25.112 127.321,26.58 cw(c127.746,26.58) 127.746,27.005 129.023,27.005 cw(c129.023,26.58) 129.448,26.58 129.448,25.112 ccw(c130.127,25.112) 130.127,24.432 131.404,24.432 ccw(c131.404,25.112) 132.083,25.112 132.083,26.58 cw(c132.508,26.58) 132.508,27.005 133.785,27.005 cw(c133.785,26.58) 134.21,26.58 134.21,25.112 ccw(c134.889,25.112) 134.889,24.432 136.166,24.432 ccw(c136.166,25.112) 136.845,25.112 136.845,26.58 cw(c137.27,26.58) 137.27,27.005 138.547,27.005 cw(c138.547,26.58) 138.972,26.58 138.972,25.112 ccw(c139.651,25.112) 139.651,24.432 140.928,24.432 ccw(c140.928,25.112) 141.607,25.112 141.607,26.58 cw(c142.032,26.58) 142.032,27.005 143.309,27.005 cw(c143.309,26.58) 143.734,26.58 143.734,25.112 ccw(c144.413,25.112) 144.413,24.432 145.69,24.432 ccw(c145.69,25.112) 146.369,25.112 146.369,26.58 cw(c146.794,26.58) 146.794,27.005 148.071,27.005 cw(c148.071,26.58) 148.496,26.58 148.496,26.472 ccw(c149.175,26.472) 149.175,25.793 151.116,25.793 154.01,25.793 157.857,29.64 166.725,29.64 167.484,30.399 167.484,31.114 167.67,31.3 v1(167.67,31.375) ; T_J2.20@176.27,33.62 175.269,32.619 175.269,32.361 175.37,32.26 175.39,32.24 175.609,32.24 175.846,32.477 177.367,32.477 177.442,32.551 177.442,32.593 T_R49.2@177.668,32.82
  other v1: 40.633,23.465
EEM_IO.LVDS_P15: D1L.4 IC20L.8 R131L.2 T_J2.23 T_R50.1 | length 181.1
  L1 w0.127: IC20L.8@35.218,5.357 35.218,6.353 v1@35.468,6.603 ; v1@35.47,6.603 36.063,6.603 R131L.2@36.226,6.441
  L4 w0.127: D1L.4@34.965,6.18 34.965,6.315 35.052,6.401 35.111,6.401 35.367,6.658 35.598,6.658 35.731,6.791 37.51,6.791 37.975,6.326 46.959,6.326 47.843,6.326 ccw(c47.843,7.005) 48.522,7.005 48.522,7.112 cw(c48.947,7.112) 48.947,7.538 50.224,7.538 cw(c50.224,7.112) 50.649,7.112 50.649,5.806 ccw(c51.328,5.806) 51.328,5.127 52.605,5.127 ccw(c52.605,5.806) 53.284,5.806 53.284,7.112 cw(c53.709,7.112) 53.709,7.538 54.986,7.538 cw(c54.986,7.112) 55.411,7.112 55.411,5.806 ccw(c56.09,5.806) 56.09,5.127 57.367,5.127 ccw(c57.367,5.806) 58.046,5.806 58.046,7.112 cw(c58.471,7.112) 58.471,7.538 59.748,7.538 cw(c59.748,7.112) 60.173,7.112 60.173,5.806 ccw(c60.852,5.806) 60.852,5.127 62.129,5.127 ccw(c62.129,5.806) 62.808,5.806 62.808,7.112 cw(c63.233,7.112) 63.233,7.538 64.51,7.538 cw(c64.51,7.112) 64.935,7.112 64.935,5.806 ccw(c65.614,5.806) 65.614,5.127 66.891,5.127 ccw(c66.891,5.806) 67.57,5.806 67.57,7.112 cw(c67.995,7.112) 67.995,7.538 69.272,7.538 cw(c69.272,7.112) 69.697,7.112 69.697,5.806 ccw(c70.376,5.806) 70.376,5.127 71.653,5.127 ccw(c71.653,5.806) 72.332,5.806 72.332,5.9 cw(c72.757,5.9) 72.757,6.326 72.948,6.326 79.454,6.326 82.412,9.283 154.151,9.283 157.049,12.182 159.584,14.717 163.784,14.717 172.404,23.338 172.404,26.112 172.404,26.802 cw(c172.531,26.802) 172.531,26.929 172.611,26.929 ccw(c172.611,27.055) 172.737,27.055 172.737,27.431 ccw(c172.611,27.431) 172.611,27.556 172.531,27.556 cw(c172.531,27.683) 172.404,27.683 172.404,28.367 172.404,29.094 172.993,29.683 174.519,29.683 174.873,29.329 174.873,28.614 174.799,28.54 ; T_J2.23@173.73,28.54 174.799,28.54 ; T_R50.1@177.668,26.801 177.442,27.027 177.442,27.069 177.367,27.143 175.376,27.143 174.873,27.646 174.873,28.466 174.799,28.54
  other v1: 35.47,6.593
EEM_IO.LVDS_P16: D1N.1 IC20N.6 T_J3.2 | length 176.3
  L1 w0.127: IC20N.6@34.715,56.142 34.715,55.867 34.841,55.741 34.841,55.337 34.706,55.202 34.706,54.624 34.929,54.401 35.209,54.401 35.395,54.215 v1(35.47,54.215)
  L4 w0.127: D1N.1@34.968,53.739 34.968,53.874 35.054,53.96 35.114,53.96 35.369,54.215 v1(35.47,54.215) 35.545,54.215 35.731,54.401 66.45,54.401 68.267,52.584 83.111,52.584 83.124,52.596 113.444,52.596 113.634,52.596 ccw(c113.634,53.276) 114.314,53.276 114.314,53.504 cw(c114.739,53.504) 114.739,53.93 116.015,53.93 cw(c116.015,53.504) 116.441,53.504 116.441,51.391 ccw(c117.12,51.391) 117.12,50.711 118.396,50.711 ccw(c118.396,51.391) 119.076,51.391 119.076,53.504 cw(c119.501,53.504) 119.501,53.93 120.777,53.93 cw(c120.777,53.504) 121.203,53.504 121.203,51.391 ccw(c121.882,51.391) 121.882,50.711 123.158,50.711 ccw(c123.158,51.391) 123.838,51.391 123.838,53.504 cw(c124.263,53.504) 124.263,53.93 125.539,53.93 cw(c125.539,53.504) 125.965,53.504 125.965,51.391 ccw(c126.644,51.391) 126.644,50.711 127.92,50.711 ccw(c127.92,51.391) 128.6,51.391 128.6,53.504 cw(c129.025,53.504) 129.025,53.93 130.301,53.93 cw(c130.301,53.504) 130.727,53.504 130.727,51.391 ccw(c131.406,51.391) 131.406,50.711 132.682,50.711 ccw(c132.682,51.391) 133.362,51.391 133.362,53.504 cw(c133.787,53.504) 133.787,53.93 135.063,53.93 cw(c135.063,53.504) 135.489,53.504 135.489,51.391 ccw(c136.168,51.391) 136.168,50.711 137.444,50.711 ccw(c137.444,51.391) 138.124,51.391 138.124,53.504 cw(c138.549,53.504) 138.549,53.93 139.825,53.93 cw(c139.825,53.504) 140.251,53.504 140.251,51.391 ccw(c140.93,51.391) 140.93,50.711 142.206,50.711 ccw(c142.206,51.391) 142.886,51.391 142.886,53.504 cw(c143.311,53.504) 143.311,53.93 144.587,53.93 cw(c144.587,53.504) 145.013,53.504 145.013,51.391 ccw(c145.692,51.391) 145.692,50.711 146.968,50.711 ccw(c146.968,51.391) 147.648,51.391 147.648,53.504 cw(c148.073,53.504) 148.073,53.93 149.349,53.93 cw(c149.349,53.504) 149.775,53.504 149.775,51.391 ccw(c150.454,51.391) 150.454,50.711 151.73,50.711 ccw(c151.73,51.391) 152.41,51.391 152.41,52.171 cw(c152.835,52.171) 152.835,52.596 155.721,52.596 159.463,52.596 159.801,52.934 160.127,53.26 160.127,54.259 160.364,54.496 160.364,54.925 160.344,54.945 160.269,55.02 160.269,55.479 T_J3.2@161.27,56.48
EEM_IO.LVDS_P17: D1P.1 IC20P.6 T_J3.5 | length 176.2
  L1 w0.127: IC20P.6@39.878,66.099 39.878,65.824 40.003,65.699 40.003,65.294 39.868,65.159 39.868,64.582 40.092,64.359 40.372,64.359 40.558,64.173 v1(40.633,64.173) ; v1(152.089,62.411) 152.164,62.411 152.349,62.596 154.114,62.596 155.936,60.774 155.936,54.294 157.678,52.552 159.38,52.552 159.873,52.059 159.873,51.535 159.738,51.4 T_J3.5@158.73,51.4
  L4 w0.127: D1P.1@40.13,63.696 40.13,63.831 40.217,63.918 40.277,63.918 40.532,64.173 v1(40.633,64.173) 40.708,64.173 40.894,64.359 70.681,64.359 72.443,62.596 75.386,62.596 76.596,62.596 cw(c76.596,62.171) 77.021,62.171 77.021,62.098 ccw(c77.701,62.098) 77.701,61.419 78.977,61.419 ccw(c78.977,62.098) 79.656,62.098 79.656,64.029 cw(c80.082,64.029) 80.082,64.455 81.358,64.455 cw(c81.358,64.029) 81.783,64.029 81.783,62.098 ccw(c82.463,62.098) 82.463,61.419 83.739,61.419 ccw(c83.739,62.098) 84.418,62.098 84.418,64.029 cw(c84.844,64.029) 84.844,64.455 86.12,64.455 cw(c86.12,64.029) 86.545,64.029 86.545,62.098 ccw(c87.225,62.098) 87.225,61.419 88.501,61.419 ccw(c88.501,62.098) 89.18,62.098 89.18,64.029 cw(c89.606,64.029) 89.606,64.455 90.882,64.455 cw(c90.882,64.029) 91.307,64.029 91.307,62.098 ccw(c91.987,62.098) 91.987,61.419 93.263,61.419 ccw(c93.263,62.098) 93.942,62.098 93.942,64.029 cw(c94.368,64.029) 94.368,64.455 95.644,64.455 cw(c95.644,64.029) 96.069,64.029 96.069,62.098 ccw(c96.749,62.098) 96.749,61.419 98.025,61.419 ccw(c98.025,62.098) 98.704,62.098 98.704,64.029 cw(c99.13,64.029) 99.13,64.455 100.406,64.455 cw(c100.406,64.029) 100.831,64.029 100.831,62.098 ccw(c101.511,62.098) 101.511,61.419 102.787,61.419 ccw(c102.787,62.098) 103.466,62.098 103.466,64.029 cw(c103.892,64.029) 103.892,64.455 105.168,64.455 cw(c105.168,64.029) 105.593,64.029 105.593,62.098 ccw(c106.273,62.098) 106.273,61.419 107.549,61.419 ccw(c107.549,62.098) 108.228,62.098 108.228,64.029 cw(c108.654,64.029) 108.654,64.455 109.93,64.455 cw(c109.93,64.029) 110.355,64.029 110.355,62.098 ccw(c111.035,62.098) 111.035,61.419 112.311,61.419 ccw(c112.311,62.098) 112.99,62.098 112.99,64.029 cw(c113.416,64.029) 113.416,64.455 114.692,64.455 cw(c114.692,64.029) 115.117,64.029 115.117,62.098 ccw(c115.797,62.098) 115.797,61.419 117.073,61.419 ccw(c117.073,62.098) 117.752,62.098 117.752,62.171 cw(c118.178,62.171) 118.178,62.596 118.368,62.596 149.231,62.596 149.922,62.596 cw(c149.922,62.469) 150.049,62.469 150.049,62.402 ccw(c150.174,62.402) 150.174,62.277 150.55,62.277 ccw(c150.55,62.402) 150.676,62.402 150.676,62.469 cw(c150.803,62.469) 150.803,62.596 151.384,62.596 151.828,62.596 152.013,62.411 v1(152.089,62.411)
EEM_IO.LVDS_P18: D1R.1 IC20R.6 T_J3.8 | length 176.3
  L1 w0.127: IC20R.6@34.715,63.006 34.715,62.731 34.841,62.605 34.841,62.2 34.706,62.066 34.706,61.488 34.929,61.265 35.209,61.265 35.395,61.079 v1(35.47,61.079) ; v1(153.905,60.032) 153.852,59.978 153.589,59.978 153.194,59.583 153.194,52.575 158.052,47.717 159.049,47.717 159.286,47.954 159.715,47.954 159.736,47.934 159.81,47.859 160.269,47.859 T_J3.8@161.27,48.86
  L4 w0.127: D1R.1@34.968,60.603 34.968,60.738 35.054,60.824 35.114,60.824 35.369,61.079 v1(35.47,61.079) 35.545,61.079 35.731,61.265 69.329,61.265 71.142,59.452 118.967,59.452 119.157,59.452 ccw(c119.157,60.132) 119.836,60.132 119.836,60.458 cw(c120.262,60.458) 120.262,60.883 121.538,60.883 cw(c121.538,60.458) 121.963,60.458 121.963,58.34 ccw(c122.643,58.34) 122.643,57.66 123.919,57.66 ccw(c123.919,58.34) 124.598,58.34 124.598,60.458 cw(c125.024,60.458) 125.024,60.883 126.3,60.883 cw(c126.3,60.458) 126.725,60.458 126.725,58.34 ccw(c127.405,58.34) 127.405,57.66 128.681,57.66 ccw(c128.681,58.34) 129.36,58.34 129.36,60.458 cw(c129.786,60.458) 129.786,60.883 131.062,60.883 cw(c131.062,60.458) 131.487,60.458 131.487,58.34 ccw(c132.167,58.34) 132.167,57.66 133.443,57.66 ccw(c133.443,58.34) 134.122,58.34 134.122,60.458 cw(c134.548,60.458) 134.548,60.883 135.824,60.883 cw(c135.824,60.458) 136.249,60.458 136.249,58.34 ccw(c136.929,58.34) 136.929,57.66 138.205,57.66 ccw(c138.205,58.34) 138.884,58.34 138.884,60.458 cw(c139.31,60.458) 139.31,60.883 140.586,60.883 cw(c140.586,60.458) 141.011,60.458 141.011,58.34 ccw(c141.691,58.34) 141.691,57.66 142.967,57.66 ccw(c142.967,58.34) 143.646,58.34 143.646,60.458 cw(c144.072,60.458) 144.072,60.883 145.348,60.883 cw(c145.348,60.458) 145.773,60.458 145.773,58.34 ccw(c146.453,58.34) 146.453,57.66 147.729,57.66 ccw(c147.729,58.34) 148.408,58.34 148.408,60.458 cw(c148.834,60.458) 148.834,60.883 150.11,60.883 cw(c150.11,60.458) 150.535,60.458 150.535,60.132 ccw(c151.215,60.132) 151.215,59.452 152.019,59.452 153.063,59.452 153.589,59.978 153.852,59.978 v1(153.905,60.032)
EEM_IO.LVDS_P19: D1T.1 IC20T.6 T_J3.11 | length 176.3
  L1 w0.127: IC20T.6@39.878,59.236 39.878,58.961 40.003,58.835 40.003,58.43 39.868,58.296 39.868,57.718 40.092,57.495 40.372,57.495 40.558,57.309 v1(40.633,57.309)
  L4 w0.127: D1T.1@40.13,56.832 40.13,56.967 40.217,57.054 40.277,57.054 40.532,57.309 v1(40.633,57.309) 40.708,57.309 40.894,57.495 68.422,57.495 70.172,55.745 72.987,55.745 73.177,55.745 ccw(c73.177,56.424) 73.857,56.424 73.857,56.619 cw(c74.282,56.619) 74.282,57.044 75.558,57.044 cw(c75.558,56.619) 75.984,56.619 75.984,55.212 ccw(c76.663,55.212) 76.663,54.533 77.939,54.533 ccw(c77.939,55.212) 78.619,55.212 78.619,56.619 cw(c79.044,56.619) 79.044,57.044 80.32,57.044 cw(c80.32,56.619) 80.746,56.619 80.746,55.212 ccw(c81.425,55.212) 81.425,54.533 82.701,54.533 ccw(c82.701,55.212) 83.381,55.212 83.381,56.619 cw(c83.806,56.619) 83.806,57.044 85.082,57.044 cw(c85.082,56.619) 85.508,56.619 85.508,55.212 ccw(c86.187,55.212) 86.187,54.533 87.463,54.533 ccw(c87.463,55.212) 88.143,55.212 88.143,56.619 cw(c88.568,56.619) 88.568,57.044 89.844,57.044 cw(c89.844,56.619) 90.27,56.619 90.27,55.212 ccw(c90.949,55.212) 90.949,54.533 92.225,54.533 ccw(c92.225,55.212) 92.905,55.212 92.905,56.619 cw(c93.33,56.619) 93.33,57.044 94.606,57.044 cw(c94.606,56.619) 95.032,56.619 95.032,55.212 ccw(c95.711,55.212) 95.711,54.533 96.987,54.533 ccw(c96.987,55.212) 97.667,55.212 97.667,56.619 cw(c98.092,56.619) 98.092,57.044 99.368,57.044 cw(c99.368,56.619) 99.794,56.619 99.794,55.212 ccw(c100.473,55.212) 100.473,54.533 101.749,54.533 ccw(c101.749,55.212) 102.429,55.212 102.429,56.619 cw(c102.854,56.619) 102.854,57.044 104.13,57.044 cw(c104.13,56.619) 104.556,56.619 104.556,55.212 ccw(c105.235,55.212) 105.235,54.533 106.511,54.533 ccw(c106.511,55.212) 107.191,55.212 107.191,56.619 cw(c107.616,56.619) 107.616,57.044 108.892,57.044 cw(c108.892,56.619) 109.318,56.619 109.318,55.212 ccw(c109.997,55.212) 109.997,54.533 111.273,54.533 ccw(c111.273,55.212) 111.953,55.212 111.953,55.32 cw(c112.378,55.32) 112.378,55.745 114.278,55.745 133.112,55.745 133.124,55.732 155.61,55.732 157.722,57.845 158.86,57.845 159.55,57.845 cw(c159.55,57.718) 159.677,57.718 159.677,57.619 ccw(c159.803,57.619) 159.803,57.493 160.179,57.493 ccw(c160.179,57.619) 160.304,57.619 160.304,57.718 cw(c160.431,57.718) 160.431,57.845 161.124,57.845 161.879,57.845 162.565,57.158 162.565,45.935 161.807,45.177 160.376,45.177 159.873,44.674 159.873,43.854 159.799,43.78 T_J3.11@158.73,43.78

## Text inside footprints (layer, text, board x,y; h text height)
T_J1: TopOverlay "30" at 192.667,21.555 h1.02 r270; Mechanical14 "30" at 192.667,21.555 h1.02 r270
T_J2: TopOverlay "30" at 177.667,21.555 h1.02 r270; Mechanical14 "30" at 177.667,21.555 h1.02 r270
T_J3: TopOverlay "30" at 162.667,21.555 h1.02 r270; Mechanical14 "30" at 162.667,21.555 h1.02 r270